# EAGLE board NixieClockControllerW (EAGLE 8.2.2)
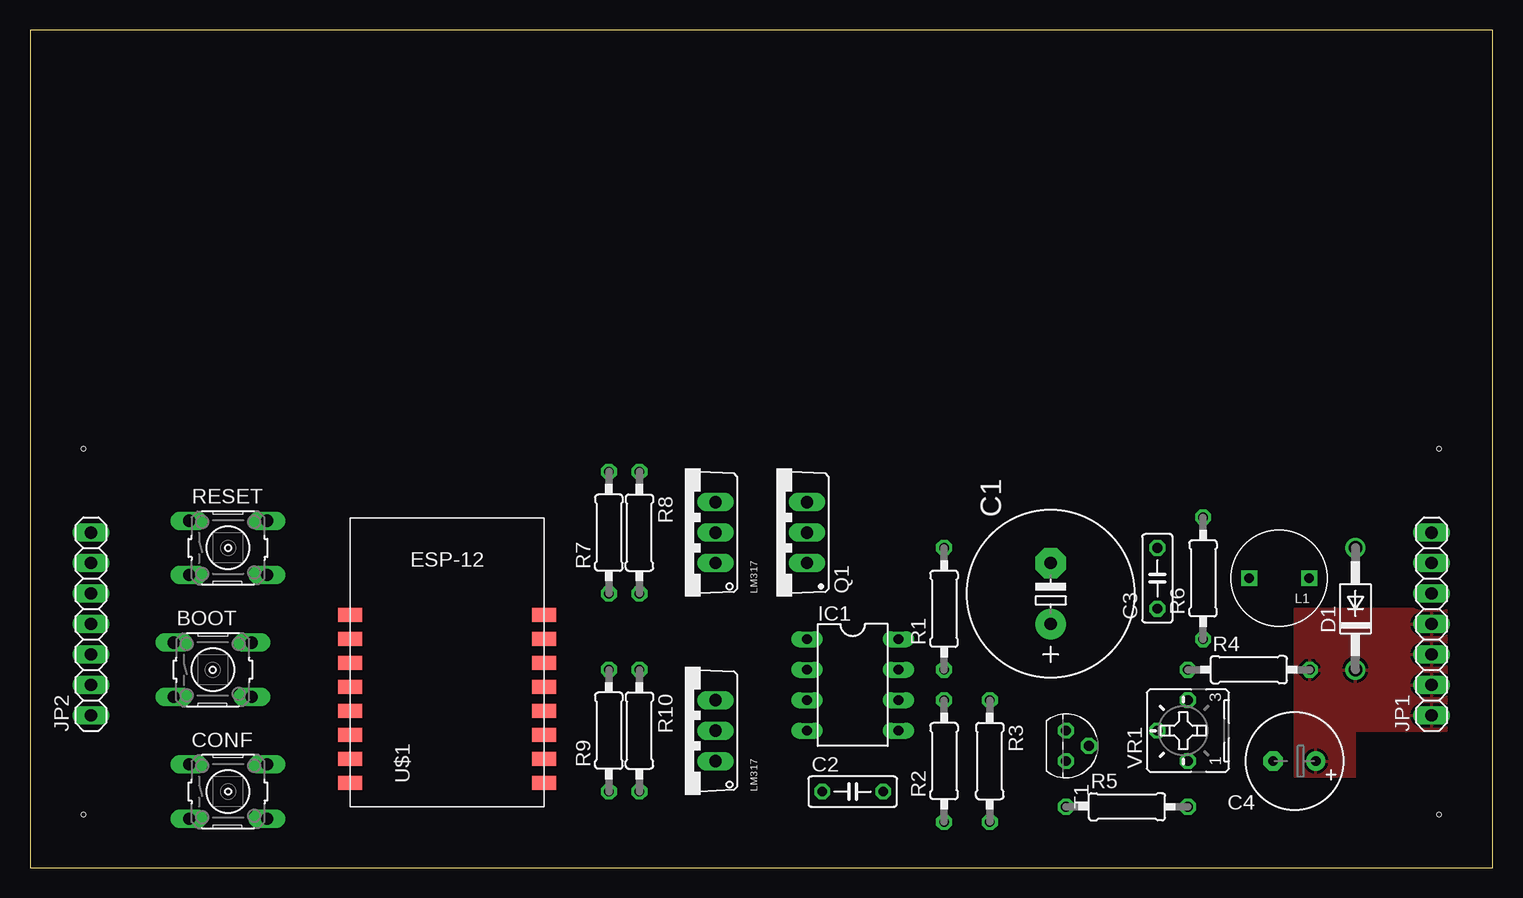
[diagram p0: board, top side]
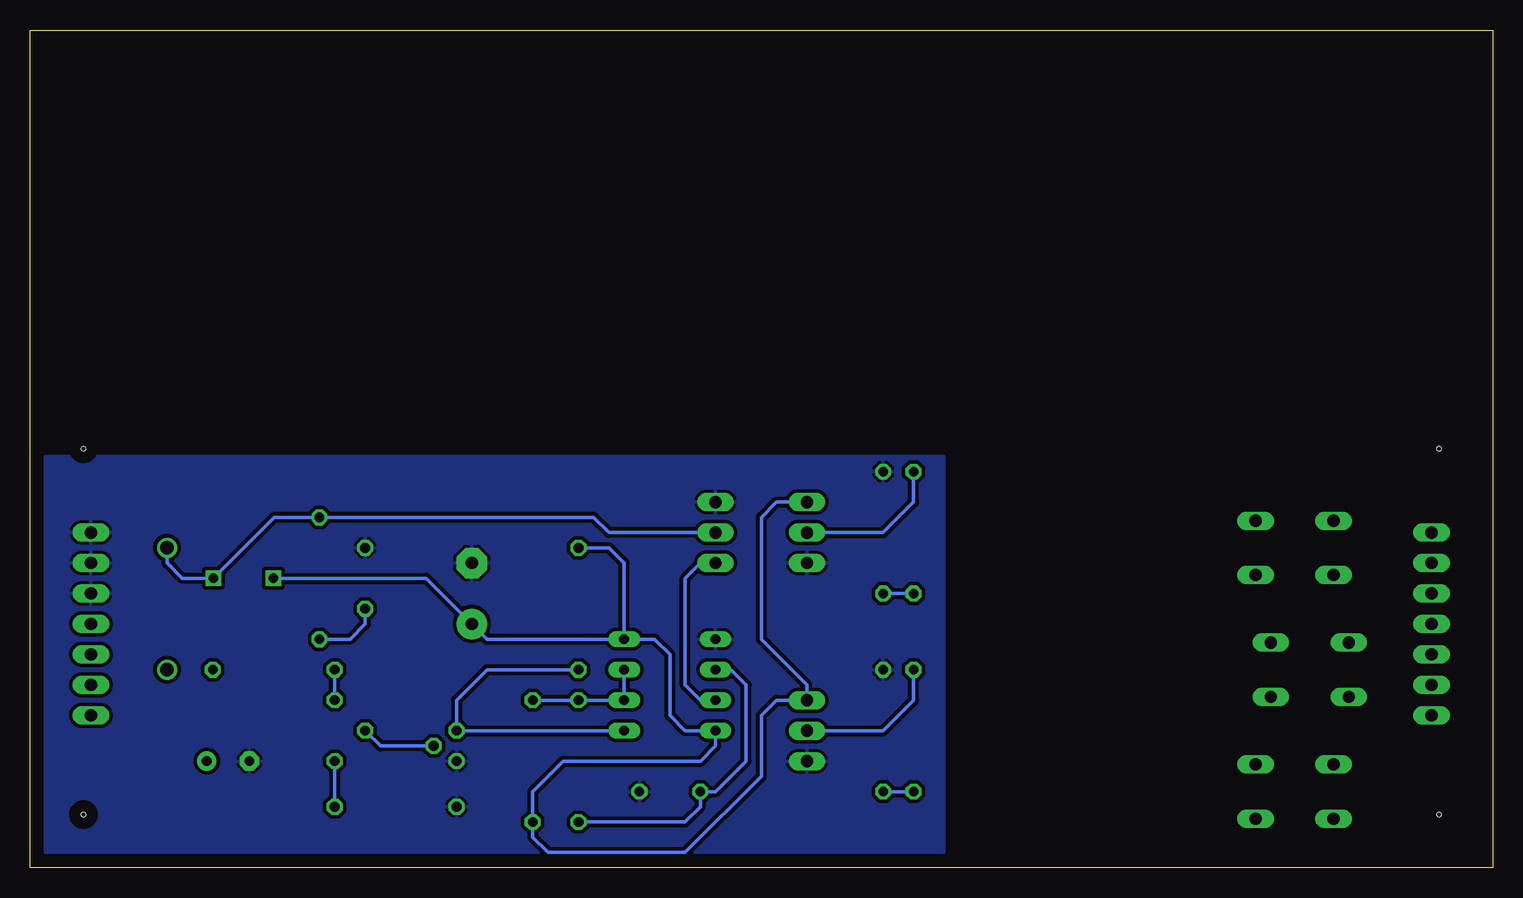
[diagram p1: board, bottom side, seen from below]

Size 121.92 x 69.85 mm. Coordinates in mm from the lower left corner, seen from the top.
Outline: 0,0 121.92,0 121.92,69.85 0,69.85 0,0
Copper layers (1*16): Top 0.035mm / dielectric 1.5mm / Bottom 0.035mm
Design rules "default": minimum track width 6mil, minimum drill 0.35mm, track to track 6mil, track to pad 6mil, pad to pad 6mil, via to via 6mil, smd to smd 6mil, copper to edge 40mil, drill to drill 6mil, minimum pad ring 10mil, minimum via ring 8mil, stop-mask expansion 4mil, vias tented up to drill 0mil, thermal gap 10mil
Holes 0.35 mm at 4.45,34.92 117.47,34.92 4.45,4.45 117.47,4.45

## Footprints (pad centres in the part's own frame; a part is rotated, then mirrored left to right if it is on the bottom)
B3F-10XX = drill 1.016 long: 1 -3.251,2.261; 2 3.251,2.261; 3 -3.251,-2.261; 4 3.251,-2.261
E5-13 = drill 1.016 pad 2.54: + -2.54,0 | drill 1.016 pad 2.54 octagon: - 2.54,0
C050-025X075 = drill 0.813 octagon: 1 -2.54,0; 2 2.54,0
E3,5-8 = drill 0.813 pad 1.6: + -1.778,0 | drill 0.813 pad 1.6 octagon: - 1.778,0
DO41-10 = drill 1.118: A 5.08,0; C -5.08,0
DIL-08 = drill 0.813 long: 1 -3.81,-3.81; 2 -1.27,-3.81; 3 1.27,-3.81; 4 3.81,-3.81; 5 3.81,3.81; 6 1.27,3.81; 7 -1.27,3.81; 8 -3.81,3.81
1X07 = drill 1.016 long: 1 -7.62,0; 2 -5.08,0; 3 -2.54,0; 4 0,0; 5 2.54,0; 6 5.08,0; 7 7.62,0
RLB0914 = drill 0.8 square: 1 -2.5,0; 2 2.5,0
TO220BV = drill 1.016 long: D 0,-2.54; G -2.54,-2.54; S 2.54,-2.54
0207/10 = drill 0.813 octagon: 1 -5.08,0; 2 5.08,0
TO92 = drill 0.813 octagon: 1 1.27,0; 2 0,1.905; 3 -1.27,0
ESP8266-ESP12 = smd 2 x 1.2: 1 16.2,2; 2 16.2,4; 3 16.2,6; 4 16.2,8; 5 16.2,10; 6 16.2,12; 7 16.2,14; 8 16.2,16; 9 0,16; 10 0,14; 11 0,12; 12 0,10; 13 0,8; 14 0,6; 15 0,4; 16 0,2
LM317-TO220AV = drill 1.016 long: ADJ -2.54,-2.54; IN 2.54,-2.54; OUT 0,-2.54
B25P = drill 0.813 octagon: A -2.54,0; E 2.54,0; S 0,2.54

## Placement (x,y rotation side)
BOOT  [B3F-10XX]  15.24,16.51 0 top
C1  470u  [E5-13]  85.09,22.86 90 top
C2  2n2  [C050-025X075]  68.58,6.35 0 top
C3  100pF  [C050-025X075]  93.98,24.13 90 top
C4  4u7  [E3,5-8]  105.41,8.89 180 top
CONF  [B3F-10XX]  16.51,6.35 0 top
D1  1N4942  [DO41-10]  110.49,21.59 90 top
IC1  NE555  [DIL-08]  68.58,15.24 270 top
JP1  [1X07]  116.84,20.32 90 top
JP2  [1X07]  5.08,20.32 90 top
L1  100uH  [RLB0914]  104.14,24.13 180 top
Q1  BUZ11BV  [TO220BV]  62.23,27.94 90 top
R1  56k  [0207/10]  76.2,21.59 90 top
R2  10k  [0207/10]  76.2,8.89 90 top
R3  1k  [0207/10]  80.01,8.89 270 top
R4  470  [0207/10]  101.6,16.51 0 top
R5  220k  [0207/10]  91.44,5.08 0 top
R6  2k2  [0207/10]  97.79,24.13 90 top
R7  270  [0207/10]  48.26,27.94 90 top
R8  470  [0207/10]  50.8,27.94 270 top
R9  220  [0207/10]  48.26,11.43 90 top
R10  680  [0207/10]  50.8,11.43 270 top
RESET  [B3F-10XX]  16.51,26.67 0 top
T1  BC547  [TO92]  86.36,10.16 270 top
U$1  ESP8266_ESP-12  [ESP8266-ESP12]  26.67,5.08 0 top
U$2  LM317-TO220  [LM317-TO220AV]  54.61,27.94 90 top
U$3  LM317-TO220  [LM317-TO220AV]  54.61,11.43 90 top
VR1  [B25P]  96.52,11.43 90 top

## Library data of the parts
BOOT CONF RESET = switch-omron; MPN: B3F-1000; OC_FARNELL: 176432; OC_NEWARK: 36M3542
C1-C4 R1-R10 = rcl
D1 = diode
IC1 = st-microelectronics; MF: Arrow Electronics; MPN: NE555N; OC_FARNELL: 1467742; OC_NEWARK: 89K1486
JP1 JP2 = pinhead
L1 = Inductors
Q1 = transistor-power
T1 = transistor
U$1 = ESP8266-ESP12
U$2 U$3 = Regulators
VR1 = pot

## Nets
3V3: R7.2 U$2.OUT
5V: R9.2 U$3.OUT
GND: C1.- C2.2 C3.2 C4.- IC1.1 JP1.5 JP1.6 JP1.7 Q1.S R5.1 R8.1 R10.1 T1.1 U$2.ADJ U$3.ADJ
HV: C4.+ D1.C JP1.1 JP1.2 JP1.3 JP1.4 R4.2
N$1: IC1.3 Q1.G
N$2: D1.A L1.1 Q1.D R6.2
N$3: IC1.6 IC1.7 R2.2 R3.1
N$4: R4.1 VR1.E
N$6: IC1.5 R1.1 T1.3
N$7: R5.2 VR1.A
N$8: T1.2 VR1.S
N$9: C3.1 R6.1
N$10: C2.1 IC1.2 R2.1
N$11: R7.1 R8.2
N$12: R9.1 R10.2
VCC: C1.+ IC1.4 IC1.8 L1.2 R1.2 R3.2 U$2.IN U$3.IN

## Tracks (layer width: path | path; a pad name or v marks a point on that pad's centre or on a via)
3V3
  Bottom 0.305: U$2.OUT 50.8,27.94 48.26,30.48 R7.2
5V
  Bottom 0.305: U$3.OUT 50.8,11.43 48.26,13.97 R9.2
GND
  pour Bottom (isolate 0.305): 45.72,1.27 120.65,1.27 120.65,34.29 45.72,34.29
HV
  pour Top (isolate 0.61): 105.41,21.59 105.41,7.62 110.49,7.62 110.49,11.43 118.11,11.43 118.11,21.59
N$1
  Bottom 0.305: IC1.3 66.04,13.97 67.31,15.24 67.31,24.13 66.04,25.4 Q1.G
N$2
  Bottom 0.305: Q1.D 73.66,27.94 74.93,29.21 R6.2 101.56,29.21 L1.1 109.22,24.13 110.49,25.4 D1.A 110.45,26.63
N$3
  Bottom 0.305: IC1.7 IC1.6 R2.2 R3.1
N$4
  Bottom 0.305: VR1.E R4.1
N$6
  Bottom 0.305: IC1.5 T1.3 86.36,13.97 83.82,16.51 R1.1
N$7
  Bottom 0.305: VR1.A R5.2
N$8
  Bottom 0.305: T1.2 92.71,10.16 VR1.S
N$9
  Bottom 0.305: C3.1 93.98,20.32 95.25,19.05 R6.1
N$10
  Bottom 0.305: R2.1 67.31,3.81 66.04,5.08 C2.1 64.77,6.35 62.23,8.89 62.23,15.24 63.5,16.51 IC1.2
N$11
  Bottom 0.305: R8.2 R7.1
N$12
  Bottom 0.305: R10.2 R9.1
VCC
  Bottom 0.305: 64.89,11.43 IC1.4 | 64.89,11.43 67.31,11.43 68.58,12.7 68.58,17.78 69.85,19.05 IC1.8 | 64.89,11.43 64.77,11.31 64.77,10.16 66.04,8.89 77.47,8.89 80.01,6.35 R3.2 80.01,2.54 78.74,1.27 67.31,1.27 60.96,7.62 60.96,12.7 59.69,13.97 U$3.IN 57.15,15.24 60.96,19.05 60.96,29.21 59.69,30.48 U$2.IN | IC1.8 72.39,25.4 73.66,26.67 R1.2 | IC1.8 83.82,19.05 C1.+ 88.9,24.13 L1.2